# Altium PCB NBP-28 Pin_Swap_Example.PcbDoc (part 3 of 4)
Units mil, origin at the board's own origin, x right, y up, seen from the top; angles counter-clockwise.
Board outline 2716.54 x 4967.15 mil, 10 copper layers (Top Layer, Mid-Layer 1, VCC1V2, Mid-Layer 2, VCC, GND, MidLayer4, VCCINT, Mid-Layer 3, Bottom Layer), stack 81 mil thick; 254 components, 445 nets, 1667 pads, 770 vias.
Unrouted connection lines stored in the file: 611.
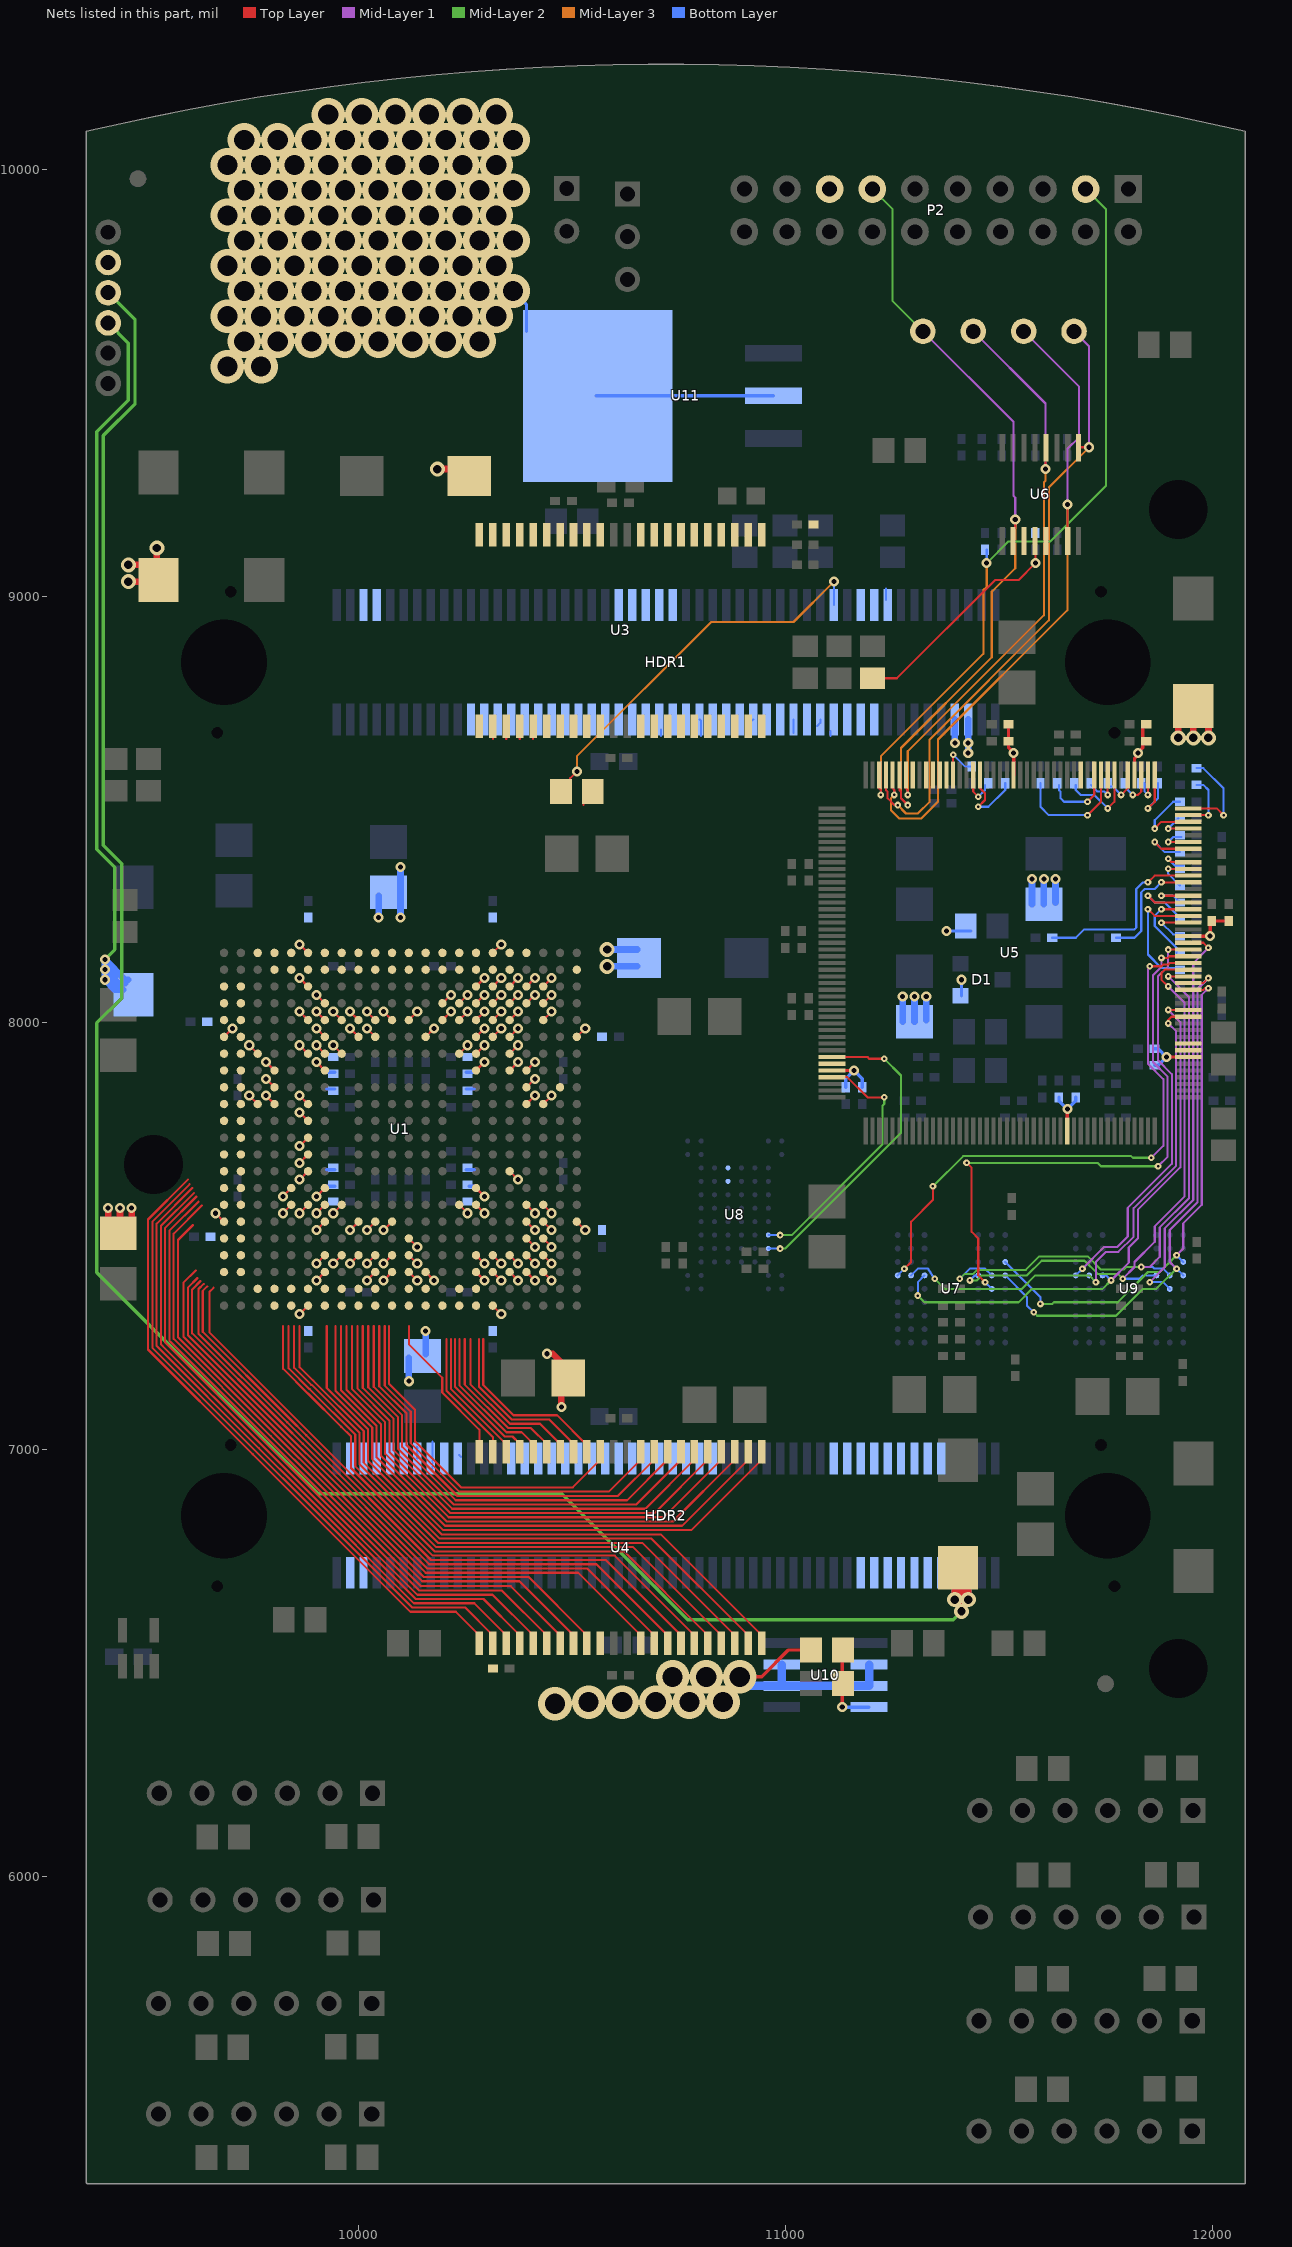
[diagram p10: the nets of this part, all layers, seen from the top]

## Via types
v1: diameter 23.62, hole 11.81, Top Layer to Bottom Layer, 495 vias
v2: diameter 78.74, hole 47.24, Top Layer to Bottom Layer, 101 vias
v3: diameter 15.75, hole 5.91, Top Layer to Bottom Layer, 92 vias
v4: diameter 35.43, hole 19.68, Top Layer to Bottom Layer, 59 vias
v5: diameter 19.68, hole 7.87, Top Layer to Bottom Layer, 23 vias

## Nets (pads, with @x,y where several pads share a name; then routed paths per layer and width w, separated by ;. In a path a pad name is that pad's centre, name@x,y a point inside that pad or via, vN(x,y) a via of type N, cw(c..) or ccw(c..) an arc to the next point about the centre after c; other vN are vias at no path point) (continued)
NetR25_1: R25.1 U5.127 | length 83.6
  Top Layer w5: v3(11897.11,8424.19) U5.127@11944.36,8424.19
  Bottom Layer w5: v3(11897.11,8424.19) 11908.93,8436 R25.1@11928.61,8436
NetR26_1: R26.1 U5.126 | length 154.1
  Top Layer w5: v3(11865.62,8424.19) 11881.37,8408.44 U5.126@11944.36,8408.44
  Bottom Layer w5: v3(11865.62,8424.19) 11889.24,8400.57 R26.1@11924.67,8400.57
NetR27_1: R27.1 U5.124 | length 92.5
  Top Layer w5: v3(11897.11,8384.82) 11904.99,8376.95 U5.124@11944.36,8376.95
  Bottom Layer w5: v3(11897.11,8384.82) 11912.86,8369.07 R27.1@11932.55,8369.07
NetR28_1: R28.1 U5.123 | length 98
  Top Layer w5: v3(11897.11,8361.2) U5.123@11944.36,8361.2
  Bottom Layer w5: v3(11897.11,8361.2) 11897.11,8349.39 R28.1@11924.67,8321.83
NetR29_1: R29.1 U5.122 | length 432.3
  Top Layer w5: v3(11849.87,8329.7) 11865.62,8345.45 U5.122@11944.36,8345.45
  Bottom Layer w5: R29.1@11625.46,8199.78 11680.58,8199.78 11700.26,8219.47 11818.37,8219.47 11822.31,8223.41 11822.31,8313.96 11838.06,8329.7 v3(11849.87,8329.7)
NetR30_1: R30.1 U5.121 | length 276.1
  Top Layer w5: v3(11881.37,8329.7) U5.121@11944.36,8329.7
  Bottom Layer w5: R30.1@11775.07,8199.78 11818.37,8199.78 11834.12,8215.53 11834.12,8306.08 11842,8313.96 11865.62,8313.96 v3(11881.37,8329.7)
NetR31_1: R31.1 U5.119 | length 112.8
  Top Layer w5: v3(11881.37,8298.21) U5.119@11944.36,8298.21
  Bottom Layer w5: v3(11881.37,8298.21) 11908.93,8298.21 R31.1@11924.67,8282.46
NetR32_1: R32.1 U5.118 | length 197.7
  Top Layer w5: v3(11849.87,8298.21) 11865.62,8282.46 U5.118@11944.36,8282.46
  Bottom Layer w5: v3(11849.87,8298.21) 11865.62,8282.46 11889.24,8282.46 11916.8,8254.9 R32.1@11916.8,8243.09
NetR33_1: R33.1 U5.117 | length 193.1
  Top Layer w5: v3(11881.37,8266.71) U5.117@11944.36,8266.71
  Bottom Layer w5: v3(11881.37,8266.71) 11865.62,8250.96 11865.62,8227.34 11916.8,8176.16 R33.1@11916.8,8164.35
NetR34_1: R34.1 U5.116 | length 299.1
  Top Layer w5: v3(11849.87,8266.71) 11865.62,8250.96 U5.116@11944.36,8250.96
  Bottom Layer w5: v3(11849.87,8266.71) 11849.87,8160.41 11881.37,8128.92 R34.1@11928.61,8128.92
NetR35_1: R35.1 U5.115 | length 125.6
  Top Layer w5: v3(11881.37,8235.22) U5.115@11944.36,8235.22
  Bottom Layer w5: v3(11881.37,8235.22) 11908.93,8207.66 R35.1@11932.55,8207.66
NetR39_1: R39.1 U5.129 | length 80.6
  Top Layer w5: v3(11897.11,8455.69) U5.129@11944.36,8455.69
  Bottom Layer w5: v3(11897.11,8455.69) R39.1@11920.74,8479.31
NetR40_1: R40.1 U5.131 | length 138.8
  Top Layer w5: U5.131@11944.36,8487.18 v3(11991.6,8487.18)
  Bottom Layer w5: R40.1@11964.04,8558.05 11979.79,8558.05 11991.6,8546.24 v3(11991.6,8487.18)
NetR41_1: R41.1 U5.133 | length 154.1
  Top Layer w5: v3(11849.87,8502.93) 11865.62,8518.68 U5.133@11865.62,8581.67
  Bottom Layer w5: v3(11849.87,8502.93) 11873.49,8526.56 R41.1@11873.49,8561.99
NetR42_1: R42.1 U5.134 | length 78.1
  Top Layer w5: v3(11849.87,8534.43) U5.134@11849.87,8581.67
  Bottom Layer w5: R42.1@11842,8561.99 11842,8542.3 v3(11849.87,8534.43)
NetR43_1: R43.1 U5.135 | length 98.7
  Top Layer w5: v3(11814.44,8534.43) 11826.25,8534.43 11834.12,8542.3 U5.135@11834.12,8581.67
  Bottom Layer w5: R43.1@11802.63,8565.92 11802.63,8546.24 v3(11814.44,8534.43)
NetR45_1: R45.1 U5.137 | length 93.4
  Top Layer w5: v3(11786.88,8534.43) 11802.63,8550.18 U5.137@11802.63,8581.67
  Bottom Layer w5: R45.1@11755.38,8554.11 11767.19,8554.11 v3(11786.88,8534.43)
NetR48_1: R48.1 U5.130 | length 181.9
  Top Layer w5: v3(11865.62,8455.69) 11881.37,8471.44 U5.130@11944.36,8471.44
  Bottom Layer w5: v3(11865.62,8455.69) 11865.62,8475.37 11908.93,8518.68 R48.1@11924.67,8518.68
NetR49_1: R49.1 U5.132 | length 234.8
  Top Layer w5: U5.132@11944.36,8502.93 12011.29,8502.93 v3(12027.04,8487.18)
  Bottom Layer w5: R49.1@11964.04,8597.42 11979.79,8597.42 12027.04,8550.18 v3(12027.04,8487.18)
NetR50_1: R50.1 U5.139 | length 189.8
  Top Layer w5: v3(11755.38,8502.93) 11771.13,8518.68 U5.139@11771.13,8581.67
  Bottom Layer w5: R50.1@11680.58,8558.05 11680.58,8546.24 11692.39,8534.43 11723.89,8534.43 v3(11755.38,8502.93)
NetR51_1: R51.1 U5.140 | length 96.4
  Top Layer w5: v3(11755.38,8534.43) U5.140@11755.38,8581.67
  Bottom Layer w5: R51.1@11716.01,8558.05 11731.39,8542.68 11747.13,8542.68 v3(11755.38,8534.43)
NetR52_1: R52.1 U5.141 | length 281
  Top Layer w5: v3(11708.14,8487.18) 11739.63,8518.68 U5.141@11739.63,8581.67
  Bottom Layer w5: R52.1@11597.9,8561.99 11597.9,8506.87 11617.59,8487.18 v3(11708.14,8487.18)
NetR53_1: R53.1 U5.142 | length 168.9
  Top Layer w5: v3(11708.14,8518.68) 11723.89,8534.43 U5.142@11723.89,8581.67
  Bottom Layer w5: R53.1@11641.21,8558.05 11641.21,8546.24 11645.15,8542.3 11645.15,8526.55 11653.02,8518.68 v3(11708.14,8518.68)
NetR54_1: R54.1 U5.159 | length 181.3
  Top Layer w5: v3(11452.23,8506.87) 11467.98,8522.62 11467.98,8538.37 11456.17,8550.18 U5.159@11456.17,8581.67
  Bottom Layer w5: v3(11452.23,8506.87) 11475.85,8506.87 11515.22,8546.24 R54.1@11515.22,8561.99
NetR55_1: R55.1 U5.160 | length 90.2
  Top Layer w5: U5.160@11440.42,8581.67 11440.42,8542.3 v3(11452.23,8530.49)
  Bottom Layer w5: v3(11452.23,8530.49) 11467.98,8546.24 R55.1@11467.98,8558.05
NetR56_1: R56.1 U5.163 | length 102
  Top Layer w5: U5.163@11393.18,8581.67 v3(11393.18,8628.92)
  Bottom Layer w5: v3(11393.18,8628.92) 11420.74,8601.36 R56.1@11436.48,8601.36
NetR64_2: R64.2 R65.1 U10.4 | length 197.5
  Top Layer w7.87: v1(11133.33,6396.63) 11133.33,6528.52 R64.2@11135.3,6530.49
  Bottom Layer w7.87: v1(11133.33,6396.63) U10.4@11196.13,6396.63
NEXUS_TCK: HDR1.82 U1.F9 | length 27.8
  Top Layer w5: v1(9979.79,7987.19) U1.F9@9999.48,7967.5
NEXUS_TDI: HDR1.84 U1.G6 | length 55.4
  Top Layer w5: v1(9861.68,7947.82) U1.G6@9881.37,7928.13
  Bottom Layer w5: HDR1.84@11235.7,8991.12 11235.7,9018.68
NEXUS_TDO: HDR1.76 R2.1 | length 896.6
  Top Layer w5: R2.1@10495.54,8561.99 10495.54,8573.8 v1(10511.29,8589.55)
  Mid-Layer 3 w5: v1(10511.29,8589.55) 10511.29,8624.98 10826.25,8939.94 11019.16,8939.94 v1(11113.65,9034.43)
  Bottom Layer w5: HDR1.76@11113.65,8979.31 v1(11113.65,9034.43)
NEXUS_TDO_R: R2.2 U1.E18 | length 43.6
  Top Layer w5: U1.E18@10353.81,8006.87 v1(10373.49,8026.56) ; 10527.04,8510.81 R2.2@10527.04,8526.55
NEXUS_TMS: HDR1.80 U1.F10 | length 27.8
  Top Layer w5: v1(10019.16,7987.19) U1.F10@10038.85,7967.5
NFLASH_CS: U5.41 U8.H2 | length 609.3
  Top Layer w5: U5.41@11109.71,7873.01 11145.15,7873.01 11192.39,7825.77 v3(11231.76,7825.77)
  Mid-Layer 2 w5: v3(10987.67,7502.93) 11015.22,7502.93 11227.82,7715.53 11227.82,7806.08 11231.76,7810.02 v3(11231.76,7825.77)
  Bottom Layer w5: U8.H2@10960.11,7502.93 v3(10987.67,7502.93)
NOE: U1.J21 U5.38 U8.J2 | length 736.8
  Top Layer w5: U5.38@11109.71,7920.26 11192.39,7920.26 11196.33,7916.32 v3(11231.76,7916.32)
  Mid-Layer 2 w5: v3(10987.67,7471.44) 10999.48,7471.44 11271.13,7743.09 11271.13,7876.95 v3(11231.76,7916.32)
  Bottom Layer w5: U8.J2@10960.11,7471.44 v3(10987.67,7471.44)
NRESETOUT: U1.F17 U5.97 U8.D5 | length 27.8
  Top Layer w5: U1.F17@10314.44,7967.5 v1(10334.12,7987.19)
NSDRAM_CAS: U5.108 U7.F7 U9.F7 | length 1367
  Top Layer w5: v3(11897.11,8085.61) 11881.37,8101.36 11881.37,8117.11 11889.24,8124.98 U5.108@11944.36,8124.98
  Mid-Layer 1 w5: v3(11790.82,7400.57) 11818.37,7428.13 11818.37,7439.94 11865.62,7487.18 11865.62,7523.34 11935.85,7593.58 11935.85,8046.87 v3(11897.11,8085.61)
  Mid-Layer 2 w5: v3(11432.55,7396.63) 11448.3,7396.63 11460.11,7408.44 11566.41,7408.44 11600.89,7442.93 11701.21,7442.93 11732.08,7412.07 11779.32,7412.07 v3(11790.82,7400.57)
  Bottom Layer w5: v3(11432.55,7396.63) 11444.36,7408.44 U7.F7@11452.23,7408.44 ; v3(11790.82,7400.57) 11830.19,7400.57 11838.06,7408.44 U9.F7@11869.56,7408.44
NSDRAM_CS: U5.105 U7.G9 U9.G9 | length 1227
  Top Layer w5: U5.105@11944.36,8077.74 11979.79,8077.74 11983.73,8081.67 v3(11991.6,8081.67)
  Mid-Layer 1 w5: v3(11916.8,7455.69) 11932.55,7471.44 11932.55,7530.49 11975.85,7573.8 11975.85,8065.93 v3(11991.6,8081.67)
  Mid-Layer 2 w5: v3(11597.9,7341.52) 11625.46,7341.52 11629.4,7345.45 11779,7345.45 11849.87,7416.32 11877.43,7416.32 v3(11916.8,7455.69)
  Bottom Layer w5: U7.G9@11515.22,7439.94 11597.9,7357.26 v3(11597.9,7341.52) ; v3(11916.8,7455.69) U9.G9@11932.55,7439.94
NSDRAM_RAS: U5.107 U7.F8 U9.F8 | length 1434.7
  Top Layer w5: v3(11897.11,8109.23) U5.107@11944.36,8109.23
  Mid-Layer 1 w5: v3(11834.12,7428.13) 11853.81,7428.13 11877.43,7451.75 11877.43,7521.01 11945.85,7589.44 11945.85,8060.49 v3(11897.11,8109.23)
  Mid-Layer 2 w5: v3(11408.93,7400.57) 11420.42,7412.07 11440.11,7412.07 11449.48,7421.44 11563.65,7421.44 11595.15,7452.93 11708.87,7452.93 11739.74,7422.07 11792.63,7422.07 11798.69,7428.13 v3(11834.12,7428.13)
  Bottom Layer w5: v3(11408.93,7400.57) 11432.55,7424.19 11467.98,7424.19 U7.F8@11483.73,7408.44 ; v3(11834.12,7428.13) 11861.34,7428.13 11865.27,7424.19 11885.3,7424.19 U9.F8@11901.05,7408.44
NSDRAM_WE: U5.106 U7.F9 U9.F9 | length 1297.4
  Top Layer w5: U5.106@11944.36,8093.48 11979.79,8093.48 v3(11991.6,8105.3)
  Mid-Layer 1 w5: v3(11916.8,7424.19) 11901.05,7439.94 11901.05,7514.74 11965.85,7579.55 11965.85,8079.55 v3(11991.6,8105.3)
  Mid-Layer 2 w5: v3(11582.15,7321.83) 11590.03,7313.96 11775.07,7313.96 11838.06,7376.95 11869.56,7376.95 v3(11916.8,7424.19)
  Bottom Layer w5: U7.F9@11515.22,7408.44 11566.41,7357.26 11566.41,7337.58 v3(11582.15,7321.83) ; v3(11916.8,7424.19) U9.F9@11932.55,7408.44
NTRST: P2.3 R57.1 U5.174 | length 1796.4
  Top Layer w5: U5.174@11219.95,8581.67 11219.95,8550.18 11223.89,8546.24 v3(11223.89,8534.43)
  Mid-Layer 2 w5: v1(11471.92,9077.74) 11523.1,9128.92 11621.52,9128.92 11751.45,9258.84 11751.45,9906.87 P2.3@11703.81,9954.51
  Mid-Layer 3 w5: v3(11223.89,8534.43) 11223.89,8624.98 11464.04,8865.14 11464.04,9014.74 11471.92,9022.62 v1(11471.92,9077.74)
  Bottom Layer w5: v1(11471.92,9077.74) R57.1@11471.92,9109.23
NWAIT: U1.P18 U5.144 | length 27.8
  Top Layer w5: U1.P18@10353.81,7652.54 v1(10373.49,7632.85)
NWE: U1.F16 U5.39 U8.C5 | length 27.8
  Top Layer w5: U1.F16@10275.07,7967.5 v1(10294.75,7987.19)
PP_CTRL.NRESETIN: P2.15 R24.1 U1.H19 U5.96 | length 27.8
  Top Layer w5: U1.H19@10393.18,7888.76 v1(10412.86,7908.45)
PRO_P.SSPCLK: U1.B17 U5.165
PRO_P.SSPEN: U1.A18 U5.166
PRO_P.SSPFRM: U1.B16 U5.164
PRO_P.SSPRX_UART2RX: U1.A19 U5.169
PRO_P.SSPTX_UART2TX: U1.B18 U5.167
PROCESSOR_TDI: R1.2 U1.B22 U6.3 U6.5
PROCESSOR_TDO: R6.1 U6.4 | length 544.8
  Top Layer w5: R6.1@11204.2,8808.05 11261.29,8808.05 11491.6,9038.37 11546.72,9038.37 v1(11586.09,9077.74) U6.4@11586.09,9128.92
RAM0_DATA0: HDR2.42 U1.V19 | length 27.8
  Top Layer w5: U1.V19@10393.18,7495.06 v1(10412.86,7475.37)
RAM0_DATA1: HDR2.40 U1.Y19 | length 27.8
  Top Layer w5: U1.Y19@10393.18,7416.32 v1(10412.86,7396.63)
RAM0_DATA2: HDR2.38 U1.W18 | length 27.8
  Top Layer w5: U1.W18@10353.81,7455.69 v1(10373.49,7436)
RAM0_DATA3: HDR2.36 U1.Y18 | length 27.8
  Top Layer w5: U1.Y18@10353.81,7416.32 v1(10373.49,7396.63)
RAM0_DATA4: HDR2.34 U1.W17 | length 27.8
  Top Layer w5: U1.W17@10314.44,7455.69 v1(10334.12,7436)
RAM0_DATA5: HDR2.32 U1.Y17 | length 27.8
  Top Layer w5: U1.Y17@10314.44,7416.32 v1(10334.12,7396.63)
RAM0_DATA6: HDR2.30 U1.W16 | length 27.8
  Top Layer w5: U1.W16@10275.07,7455.69 v1(10294.75,7436)
RAM0_DATA7: HDR2.28 U1.Y16 | length 27.8
  Top Layer w5: U1.Y16@10275.07,7416.32 v1(10294.75,7396.63)
RAM0_OE: HDR1.41 U1.C20 | length 27.8
  Top Layer w5: U1.C20@10432.55,8085.61 v1(10452.23,8105.3)
RAM0_WE: HDR1.79 U1.E20 | length 27.8
  Top Layer w5: U1.E20@10432.55,8006.87 v1(10452.23,8026.56)
RAM1_DATA0: HDR1.45 U1.E8 | length 27.8
  Top Layer w5: v1(9940.42,8026.56) U1.E8@9960.11,8006.87
RAM1_DATA1: HDR1.49 U1.E6 | length 43.6
  Top Layer w5: v1(9861.68,8026.56) U1.E6@9881.37,8006.87
  Bottom Layer w5: 10708.14,8672.22 HDR1.49@10708.14,8687.97
RAM1_DATA2: HDR1.53 U1.E10 | length 27.8
  Top Layer w5: v1(10019.16,8026.56) U1.E10@10038.85,8006.87
RAM1_DATA3: HDR1.57 U1.E12 | length 27.8
  Top Layer w5: U1.E12@10117.59,8006.87 v1(10137.27,8026.56)
RAM1_DATA4: HDR1.55 U1.E11 | length 68.8
  Top Layer w5: v1(10058.53,8026.56) U1.E11@10078.22,8006.87
  Bottom Layer w5: HDR1.55@10798.69,8711.59 10802.63,8707.66 10802.63,8672.22
RAM1_DATA5: HDR1.51 U1.E7 | length 27.8
  Top Layer w5: v1(9901.05,8026.56) U1.E7@9920.74,8006.87
RAM1_DATA6: HDR1.47 U1.E9 | length 27.8
  Top Layer w5: v1(9979.79,8026.56) U1.E9@9999.48,8006.87
RAM1_DATA7: HDR1.43 U1.F7 | length 27.8
  Top Layer w5: v1(9901.05,7987.19) U1.F7@9920.74,7967.5
RAM1_OE: HDR1.39 U1.D19 | length 27.8
  Top Layer w5: U1.D19@10393.18,8046.24 v1(10412.86,8065.93)
RAM1_WE: HDR1.61 U1.E14 | length 27.8
  Top Layer w5: U1.E14@10196.33,8006.87 v1(10216.01,8026.56)
RAM_ADDR0: HDR1.21 U1.D14 | length 27.8
  Top Layer w5: U1.D14@10196.33,8046.24 v1(10216.01,8065.93)
RAM_ADDR1: HDR1.25 U1.C16 | length 27.8
  Top Layer w5: U1.C16@10275.07,8085.61 v1(10294.75,8105.3)
RAM_ADDR2: HDR1.29 U1.C17 | length 27.8
  Top Layer w5: U1.C17@10314.44,8085.61 v1(10334.12,8105.3)
RAM_ADDR3: HDR1.33 U1.C18 | length 27.8
  Top Layer w5: U1.C18@10353.81,8085.61 v1(10373.49,8105.3)
RAM_ADDR4: HDR1.65 U1.E17 | length 27.8
  Top Layer w5: U1.E17@10314.44,8006.87 v1(10334.12,8026.56)
RAM_ADDR5: HDR1.69 U1.A16 | length 31.5
  Bottom Layer w5: HDR1.69@11019.16,8680.1 HDR1.69@11019.16,8711.59
RAM_ADDR6: HDR1.73 U1.F18 | length 46.8
  Top Layer w5: U1.F18@10353.81,7967.5 v1(10373.49,7987.19)
  Bottom Layer w5: HDR1.73@11074.28,8695.85 11082.15,8703.72 HDR1.73@11082.15,8711.59
RAM_ADDR7: HDR1.77 U1.D20 | length 27.8
  Top Layer w5: U1.D20@10432.55,8046.24 v1(10452.23,8065.93)
RAM_ADDR8: HDR1.75 U1.G18 | length 39.7
  Top Layer w5: U1.G18@10353.81,7928.13 v1(10373.49,7947.82)
  Bottom Layer w5: 11105.78,8672.22 HDR1.75@11105.78,8684.04
RAM_ADDR9: HDR1.71 U1.B15
RAM_ADDR10: HDR1.67 U1.E16 | length 27.8
  Top Layer w5: U1.E16@10275.07,8006.87 v1(10294.75,8026.56)
RAM_ADDR11: HDR1.63 U1.E15 | length 70.5
  Top Layer w5: U1.E15@10235.7,8006.87 v1(10255.38,8026.56)
  Bottom Layer w5: 10916.8,8672.22 10916.8,8703.72 HDR1.63@10924.67,8711.59
RAM_ADDR12: HDR1.59 U1.F13 | length 27.8
  Top Layer w5: U1.F13@10156.96,7967.5 v1(10176.64,7987.19)
RAM_ADDR13: HDR1.35 U1.D18 | length 27.8
  Top Layer w5: U1.D18@10353.81,8046.24 v1(10373.49,8065.93)
RAM_ADDR14: HDR1.31 U1.D17 | length 27.8
  Top Layer w5: U1.D17@10314.44,8046.24 v1(10334.12,8065.93)
RAM_ADDR15: HDR1.27 U1.D16 | length 27.8
  Top Layer w5: U1.D16@10275.07,8046.24 v1(10294.75,8065.93)
RAM_ADDR16: HDR1.23 U1.D15 | length 27.8
  Top Layer w5: U1.D15@10235.7,8046.24 v1(10255.38,8065.93)
RAM_CS: HDR1.37 U1.C19 | length 27.8
  Top Layer w5: U1.C19@10393.18,8085.61 v1(10412.86,8105.3)
RED0: HDR1.6 U1.D7 | length 27.8
  Top Layer w5: v1(9901.05,8065.93) U1.D7@9920.74,8046.24
RED1: HDR1.8 U1.C6 | length 27.8
  Top Layer w5: v1(9861.68,8105.3) U1.C6@9881.37,8085.61
REF_CLK: HDR2.4 U1.AB12
SCL: HDR2.5 U1.Y7 | length 27.8
  Top Layer w5: v1(9901.05,7396.63) U1.Y7@9920.74,7416.32
SDA: HDR2.3 U1.W7 | length 27.8
  Top Layer w5: v1(9901.05,7436) U1.W7@9920.74,7455.69
SDRAM_CKE: U5.102 U7.F3 U9.F3 | length 1319.2
  Top Layer w5: v3(11897.11,8030.49) U5.102@11944.36,8030.49
  Mid-Layer 1 w5: v3(11763.26,7396.63) 11804.94,7438.32 11804.94,7473.75 11826.25,7495.06 11826.25,7561.99 11925.85,7661.59 11925.85,8001.75 v3(11897.11,8030.49)
  Mid-Layer 2 w5: v3(11310.5,7361.2) 11326.25,7345.45 11546.72,7345.45 11578.22,7376.95 11743.57,7376.95 v3(11763.26,7396.63)
  Bottom Layer w5: v3(11310.5,7361.2) 11310.5,7392.7 U7.F3@11326.25,7408.44 ; U9.F3@11743.57,7408.44 11751.45,7408.44 v3(11763.26,7396.63)
SDRAM_CLK: U5.101 U7.F2 U9.F2 | length 1271.3
  Top Layer w5: v3(11897.11,7999) 11897.11,8006.87 11904.99,8014.74 U5.101@11944.36,8014.74
  Mid-Layer 1 w5: v3(11727.82,7392.7) 11727.82,7439.94 11751.45,7463.56 11780.61,7463.56 11816.25,7499.2 11816.25,7566.13 11915.85,7665.74 11915.85,7980.26 v3(11897.11,7999)
  Mid-Layer 2 w5: v3(11349.87,7400.57) 11373.49,7376.95 11554.59,7376.95 11586.09,7408.44 11712.08,7408.44 v3(11727.82,7392.7)
  Bottom Layer w5: U7.F2@11294.75,7408.44 11310.5,7424.19 11334.12,7424.19 v3(11349.87,7400.57) ; U9.F2@11712.08,7408.44 v3(11727.82,7392.7)
SDRAM_DQM0: U5.112 U9.E8 | length 946.4
  Top Layer w5: U5.112@11944.36,8187.97 11979.79,8187.97 v3(11991.6,8176.16)
  Mid-Layer 1 w5: v3(11853.81,7392.7) 11889.24,7428.13 11889.24,7518.68 11955.85,7585.3 11955.85,8140.41 v3(11991.6,8176.16)
  Bottom Layer w5: v3(11853.81,7392.7) 11885.3,7392.7 U9.E8@11901.05,7376.95
SDRAM_DQM1: U5.111 U9.F1 | length 945.5
  Top Layer w5: v3(11897.11,8172.22) U5.111@11944.36,8172.22
  Mid-Layer 1 w5: v3(11696.33,7424.19) 11747.51,7475.37 11778.28,7475.37 11802.63,7499.72 11802.63,7566.65 11905.85,7669.88 11905.85,7880.02 11873.49,7912.38 11873.49,8109.23 11897.11,8132.85 v3(11897.11,8172.22)
  Bottom Layer w5: U9.F1@11680.58,7408.44 v3(11696.33,7424.19)
SDRAM_DQM2: U5.110 U7.E8 | length 1356.2
  Top Layer w5: v3(11424.67,7672.22) 11436.48,7660.41 11436.48,7510.81 11452.23,7495.06 11452.23,7408.44 v3(11467.98,7392.7) ; v3(11881.37,8152.54) 11897.11,8152.54 11901.05,8156.48 U5.110@11944.36,8156.48
  Mid-Layer 1 w5: v3(11873.49,7664.35) 11895.85,7686.71 11895.85,7874.27 11861.68,7908.44 11861.68,8111.56 11881.37,8131.25 v3(11881.37,8152.54)
  Mid-Layer 2 w5: v3(11424.67,7672.22) 11731.76,7672.22 11739.63,7664.35 v3(11873.49,7664.35)
  Bottom Layer w5: v3(11467.98,7392.7) U7.E8@11483.73,7376.95
SDRAM_DQM3: U5.109 U7.F1 | length 1355.8
  Top Layer w5: v3(11279,7424.19) 11294.75,7439.94 11294.75,7534.43 11345.93,7585.61 v3(11345.93,7617.11) ; v3(11853.81,8132.85) 11881.37,8132.85 11885.3,8136.79 11897.11,8136.79 11901.05,8140.73 U5.109@11944.36,8140.73
  Mid-Layer 1 w5: v3(11853.81,8132.85) 11849.87,8124.98 11849.87,7904.51 11885.85,7868.52 11885.85,7712.15 v3(11857.74,7684.04)
  Mid-Layer 2 w5: v3(11345.93,7617.11) 11416.8,7687.97 11810.5,7687.97 11814.44,7684.04 v3(11857.74,7684.04)
  Bottom Layer w5: U7.F1@11263.26,7408.44 v3(11279,7424.19)
SP0: HDR2.79 U1.K6 | length 27.8
  Top Layer w5: v1(9861.68,7829.71) U1.K6@9881.37,7810.02
SP1: HDR2.81 U1.T5 | length 27.8
  Top Layer w5: v1(9822.31,7554.11) U1.T5@9842,7573.8
SP2: HDR2.83 U1.M2
SP3: HDR2.85 U1.T6 | length 27.8
  Top Layer w5: v1(9861.68,7554.11) U1.T6@9881.37,7573.8
SP4: HDR2.87 U1.R5 | length 27.8
  Top Layer w5: v1(9822.31,7593.48) U1.R5@9842,7613.17
SP5: HDR2.89 U1.U7 | length 27.8
  Top Layer w5: v1(9901.05,7514.74) U1.U7@9920.74,7534.43
SP6: HDR2.91 U1.P6 | length 27.8
  Top Layer w5: v1(9861.68,7632.85) U1.P6@9881.37,7652.54
SP7: HDR2.90 U1.L6 | length 27.8
  Top Layer w5: v1(9861.68,7790.34) U1.L6@9881.37,7770.65
SP8: HDR2.92 U1.U11 | length 27.8
  Top Layer w5: v1(10058.53,7514.74) U1.U11@10078.22,7534.43
SP9: HDR2.88 U1.M6 | length 27.8
  Top Layer w5: v1(9861.68,7711.59) U1.M6@9881.37,7731.28
SP10: HDR2.86 U1.U10 | length 27.8
  Top Layer w5: v1(10019.16,7514.74) U1.U10@10038.85,7534.43
SP11: HDR2.84 U1.U9 | length 27.8
  Top Layer w5: v1(9979.79,7514.74) U1.U9@9999.48,7534.43
SP12: HDR2.82 U1.N6 | length 27.8
  Top Layer w5: v1(9861.68,7672.22) U1.N6@9881.37,7691.91
SP13: HDR2.80 U1.J19 | length 27.8
  Top Layer w5: U1.J19@10393.18,7849.39 v1(10412.86,7869.08)
SP14: HDR2.78 U1.K20 | length 27.8
  Top Layer w5: U1.K20@10432.55,7810.02 v1(10452.23,7829.71)
SP15: HDR2.76 U1.K19 | length 27.8
  Top Layer w5: U1.K19@10393.18,7810.02 v1(10412.86,7829.71)
SPI_CLK: HDR1.46 U1.H4 | length 27.8
  Top Layer w5: v1(9782.94,7908.45) U1.H4@9802.63,7888.76
SPI_DIN: HDR1.44 U1.G3 | length 27.8
  Top Layer w5: v1(9743.57,7947.82) U1.G3@9763.26,7928.13
SPI_DOUT: HDR1.50 U1.K4 | length 27.8
  Top Layer w5: v1(9782.94,7829.71) U1.K4@9802.63,7810.02
SPI_MODE: HDR1.52 U1.K3 | length 27.8
  Top Layer w5: v1(9743.57,7829.71) U1.K3@9763.26,7810.02
SPI_SEL: HDR1.48 U1.J4 | length 27.8
  Top Layer w5: v1(9782.94,7869.08) U1.J4@9802.63,7849.39
SRAM0_A0: U1.A13 U3.1 | length 4.9
  Top Layer w5: U3.1@10282.94,8695.85 U3.1@10282.94,8700.77
SRAM0_A1: U1.B13 U3.2 | length 34.4
  Top Layer w5: 10314.44,8666.32 U3.2@10314.44,8700.77
SRAM0_A2: U1.A14 U3.3 | length 34.4
  Top Layer w5: 10345.93,8666.32 U3.3@10345.93,8700.77
SRAM0_A3: U1.B14 U3.4 | length 34.4
  Top Layer w5: 10377.43,8666.32 U3.4@10377.43,8700.77
SRAM0_A4: U1.A15 U3.5 | length 34.4
  Top Layer w5: 10408.93,8666.32 U3.5@10408.93,8700.77
SRAM0_A5: U1.B7 U3.18
SRAM0_A6: U1.A7 U3.19
SRAM0_A7: U1.B6 U3.20
SRAM0_A8: U1.B5 U3.21
SRAM0_A9: U1.A5 U3.22
SRAM0_A10: U1.B4 U3.23
SRAM0_A11: U1.A4 U3.24
SRAM0_A12: U1.A3 U3.25
SRAM0_A13: U1.C2 U3.26
SRAM0_A14: U1.C1 U3.27
SRAM0_A15: U1.K1 U3.42
SRAM0_A16: U1.L2 U3.43 | length 18.7
  Top Layer w5: U3.43@10314.44,9121.04 U3.43@10314.44,9139.74
SRAM0_A17: U1.L1 U3.44
SRAM0_A18: U1.D2 U3.28
SRAM0_D0: U1.A12 U3.7
SRAM0_D1: U1.B11 U3.8
SRAM0_D2: U1.A11 U3.9
SRAM0_D3: U1.B10 U3.10
SRAM0_D4: U1.A10 U3.13
SRAM0_D5: U1.B9 U3.14
SRAM0_D6: U1.A9 U3.15
SRAM0_D7: U1.B8 U3.16
SRAM0_D8: U1.D1 U3.29
SRAM0_D9: U1.E2 U3.30
SRAM0_D10: U1.E1 U3.31
SRAM0_D11: U1.F2 U3.32
SRAM0_D12: U1.G2 U3.35
SRAM0_D13: U1.G1 U3.36
SRAM0_D14: U1.H2 U3.37
SRAM0_D15: U1.H1 U3.38
SRAM0_E: U1.B12 U3.6
SRAM0_LB: U1.J2 U3.39
SRAM0_OE: U1.K2 U3.41
SRAM0_UB: U1.J1 U3.40
SRAM0_W: U1.A8 U3.17
SRAM1_A0: U1.Y12 U4.1 | length 1537.3
  Top Layer w5: 9599.71,7632.85 9506.41,7539.55 9506.41,7234.76 9751.85,6989.32 9840.01,6901.15 10121.16,6620 10227.88,6620 10282.94,6564.94 U4.1@10282.94,6546.24 ; U1.Y12@10117.59,7416.32 v1(10137.27,7396.63)
SRAM1_A1: R19.2 U1.W12 U4.2 | length 1543.1
  Top Layer w5: 9603.88,7622.06 9516.41,7534.58 9516.41,7238.9 10125.31,6630 10249.38,6630 10314.44,6564.94 U4.2@10314.44,6546.24 ; U1.W12@10117.59,7455.69 v1(10137.27,7436)
SRAM1_A2: U1.N1 U4.3 | length 1523.9
  Top Layer w5: 9610,7613.17 9526.41,7529.57 9526.41,7243.04 9765.99,7003.46 9860.01,6909.44 10129.45,6640 10270.87,6640 10345.93,6564.94 U4.3@10345.93,6546.24
SRAM1_A3: U1.N2 U4.4 | length 1528.5
  Top Layer w5: 9613.65,7601.36 9536.41,7524.11 9536.41,7247.18 9539.45,7244.14 9540,7243.59 9775.99,7007.6 10133.59,6650 10292.37,6650 10377.43,6564.94 U4.4@10377.43,6546.24
SRAM1_A4: U1.P1 U4.5 | length 1538.2
  Top Layer w5: 9620,7593.48 9546.41,7519.89 9546.41,7251.33 9549.45,7248.28 9550,7247.73 9780.13,7017.6 9880.01,6917.72 10137.63,6660.1 10313.77,6660.1 10408.93,6564.94 U4.5@10408.93,6546.24
SRAM1_A5: U1.Y1 U4.18 | length 1416.6
  Top Layer w5: 9823.06,7290 9823.06,7189.42 9880.71,7131.77 9881.23,7131.77 9959.25,7053.75 9959.44,7053.75 9981.93,7031.27 9981.93,6957.22 10177.61,6761.54 10621.77,6761.54 10818.37,6564.94 U4.18@10818.37,6546.24
SRAM1_A6: U1.Y2 U4.19 | length 1434.5
  Top Layer w5: 9835.93,7290 9835.93,7190.69 9884.85,7141.77 9885.57,7141.77 9991.93,7035.41 9991.93,6961.37 10181.75,6771.54 10643.27,6771.54 10849.87,6564.94 U4.19@10849.87,6546.24
SRAM1_A7: U1.AA3 U4.20 | length 1452.4
  Top Layer w5: 9848.81,7290 9848.81,7191.96 9889,7151.77 9889.71,7151.77 10001.93,7039.55 10001.93,6965.51 10185.89,6781.54 10664.76,6781.54 10881.37,6564.94 U4.20@10881.37,6546.24
SRAM1_A8: U1.AB4 U4.21 | length 1470.3
  Top Layer w5: 9861.68,7290 9861.68,7193.23 9893.14,7161.77 9893.85,7161.77 10011.93,7043.69 10011.93,6969.65 10190.04,6791.54 10686.26,6791.54 10912.86,6564.94 U4.21@10912.86,6546.24
SRAM1_A9: U1.AA4 U4.22 | length 1466.7
  Top Layer w5: 9925.31,7290 9925.31,7144.46 10021.93,7047.83 10021.93,6973.79 10194.18,6801.54 10707.75,6801.54 10944.36,6564.94 U4.22@10944.36,6546.24
SRAM1_A10: U1.AB5 U4.23 | length 1416.3
  Top Layer w5: 9945.33,7290 9945.33,7138.58 10031.93,7051.98 10031.93,6977.93 10198.32,6811.54 10779.54,6811.54 10944.36,6976.36 U4.23@10944.36,6995.06
SRAM1_A11: U1.AA5 U4.24 | length 1362.9
  Top Layer w5: 9958.2,7290 9958.2,7139.85 10041.93,7056.12 10041.93,6982.08 10202.46,6821.54 10758.05,6821.54 10912.86,6976.36 U4.24@10912.86,6995.06
SRAM1_A12: U1.AA6 U4.25 | length 1309.5
  Top Layer w5: 9971.08,7290 9971.08,7141.11 10051.93,7060.26 10051.93,6986.22 10206.6,6831.54 10736.55,6831.54 10881.37,6976.36 U4.25@10881.37,6995.06
SRAM1_A13: U1.AB7 U4.26 | length 1256.1
  Top Layer w5: 9983.95,7290 9983.95,7142.38 10061.93,7064.4 10061.93,6990.36 10210.75,6841.54 10715.06,6841.54 10849.87,6976.36 U4.26@10849.87,6995.06
SRAM1_A14: U1.AA7 U4.27 | length 1202.7
  Top Layer w5: 9996.82,7290 9996.82,7143.65 10071.93,7068.54 10071.93,6994.5 10214.89,6851.54 10693.56,6851.54 10818.37,6976.36 U4.27@10818.37,6995.06
SRAM1_A15: U1.AA12 U4.42 | length 317.6
  Top Layer w5: 10215.95,7258.84 10215.95,7142.8 10345.93,7012.82 U4.42@10345.93,6995.06
SRAM1_A16: U1.AB11 U4.43 | length 308.7
  Top Layer w5: 10205.95,7258.84 10205.95,7138.1 10314.44,7029.62 U4.43@10314.44,6995.06
SRAM1_A17: U1.AA10 U4.44 | length 363.4
  Top Layer w5: 10117.59,7290 10117.59,7246.78 10195.95,7168.41 10195.95,7133.96 10282.94,7046.97 U4.44@10282.94,6995.06
SRAM1_A18: U1.AB8 U4.28 | length 1149.3
  Top Layer w5: 10009.7,7290 10009.7,7144.92 10081.93,7072.69 10081.93,6998.65 10219.03,6861.54 10672.06,6861.54 10786.88,6976.36 U4.28@10786.88,6995.06
SRAM1_D0: U1.R1 U4.7 | length 1552
  Top Layer w5: 9632.35,7572.35 9566.41,7506.41 9566.41,7259.61 9794.27,7031.74 9900.01,6926 10145.92,6680.1 10356.76,6680.1 10471.92,6564.94 U4.7@10471.92,6546.24
SRAM1_D1: U1.R2 U4.8 | length 1512.6
  Top Layer w5: 9611.57,7526.63 9576.41,7491.46 9576.41,7263.75 10148.61,6691.54 10376.81,6691.54 10503.41,6564.94 U4.8@10503.41,6546.24
SRAM1_D2: U1.T1 U4.9 | length 1421.3
  Top Layer w5: 9618.21,7420 9589.22,7391.02 9589.22,7265.08 9808.42,7045.88 9920.01,6934.29 10152.76,6701.54 10398.31,6701.54 10534.91,6564.94 U4.9@10534.91,6546.24
SRAM1_D3: U1.T2 U4.10
SRAM1_D4: U1.U2 U4.13 | length 1514.4
  Top Layer w5: 9622.35,7402.35 9599.71,7379.71 9599.71,7268.73 9600,7268.44 10156.9,6711.54 10514.29,6711.54 10660.89,6564.94 U4.13@10660.89,6546.24
SRAM1_D5: U1.V1 U4.14 | length 1525.2
  Top Layer w5: 9629.42,7395.28 9609.71,7375.57 9609.71,7272.87 9822.56,7060.03 9868.83,7013.75 10161.04,6721.54 10535.79,6721.54 10692.39,6564.94 U4.14@10692.39,6546.24
SRAM1_D6: U1.V2 U4.15 | length 1532.6
  Top Layer w5: 9637,7388.71 9624.7,7376.41 9624.7,7272.03 9832.56,7064.17 10165.18,6731.54 10557.28,6731.54 10723.89,6564.94 U4.15@10723.89,6546.24
SRAM1_D7: U1.W1 U4.16 | length 1544.9
  Top Layer w5: 9645.15,7382.73 9634.7,7372.27 9634.7,7276.17 9836.7,7074.17 9877.12,7033.75 10169.32,6741.54 10578.78,6741.54 10755.38,6564.94 U4.16@10755.38,6546.24
SRAM1_D8: U1.AA8 U4.29 | length 1095.9
  Top Layer w5: 10022.57,7290 10022.57,7146.19 10091.93,7076.83 10091.93,7002.79 10223.17,6871.54 10650.57,6871.54 10755.38,6976.36 U4.29@10755.38,6995.06
SRAM1_D9: U1.AB9 U4.30 | length 1042.5
  Top Layer w5: 10035.45,7290 10035.45,7147.45 10101.93,7080.97 10101.93,7006.93 10227.31,6881.54 10629.07,6881.54 10723.89,6976.36 U4.30@10723.89,6995.06
SRAM1_D10: U1.AA9 U4.31 | length 989.1
  Top Layer w5: 10048.32,7290 10048.32,7148.72 10111.93,7085.11 10111.93,7011.07 10231.46,6891.54 10607.58,6891.54 10692.39,6976.36 U4.31@10692.39,6995.06
SRAM1_D11: U1.AB10 U4.32 | length 935.7
  Top Layer w5: 10061.15,7290 10061.15,7150.04 10121.93,7089.26 10121.93,7015.21 10235.6,6901.54 10586.08,6901.54 10660.89,6976.36 U4.32@10660.89,6995.06
SRAM1_D12: U1.AA16 U4.35 | length 820.5
  Top Layer w5: 10071.15,7290 10071.15,7154.18 10131.93,7093.4 10131.93,7019.36 10239.74,6911.54 10501.59,6911.54 10566.41,6976.36 U4.35@10566.41,6995.06
SRAM1_D13: U1.AB16 U4.36 | length 424.4
  Top Layer w5: 10291.88,7258.84 10291.88,7151.72 10362.91,7080.69 10465.24,7080.69 10534.91,7011.02 U4.36@10534.91,6995.06
SRAM1_D14: U1.AA15 U4.37 | length 406.9
  Top Layer w5: 10281.88,7258.84 10281.88,7147.58 10358.77,7070.69 10446.48,7070.69 10503.41,7013.76 U4.37@10503.41,6995.06
SRAM1_D15: U1.AB15 U4.38 | length 392
  Top Layer w5: 10261.76,7258.84 10261.76,7153.56 10354.63,7060.69 10424.99,7060.69 10471.92,7013.76 U4.38@10471.92,6995.06
SRAM1_E: U1.P2 U4.6 | length 1543.4
  Top Layer w5: 9625,7581.67 9556.41,7513.08 9556.41,7255.47 9559.45,7252.43 10141.78,6670.1 10335.26,6670.1 10440.42,6564.94 U4.6@10440.42,6546.24
SRAM1_LB: U1.AB14 U4.39 | length 374.2
  Top Layer w5: 10248.7,7258.84 10248.7,7152.47 10350.49,7050.69 10403.49,7050.69 10440.42,7013.76 U4.39@10440.42,6995.06
SRAM1_OE: U1.AB13 U4.41 | length 337.2
  Top Layer w5: 10225.95,7258.84 10225.95,7146.94 10342.2,7030.69 10360.5,7030.69 10377.43,7013.76 U4.41@10377.43,6995.06
SRAM1_UB: U1.AA13 U4.40 | length 356.3
  Top Layer w5: 10235.95,7258.84 10235.95,7151.08 10346.35,7040.69 10382,7040.69 10408.93,7013.76 U4.40@10408.93,6995.06
SRAM1_W: U1.W2 U4.17 | length 1558.5
  Top Layer w5: 9660,7379.71 9650,7369.71 9650,7275.01 10173.47,6751.54 10600.27,6751.54 10786.88,6564.94 U4.17@10786.88,6546.24
SW0: HDR2.44 U1.W19 | length 27.8
  Top Layer w5: U1.W19@10393.18,7455.69 v1(10412.86,7436)
SW1: HDR2.46 U1.Y20 | length 27.8
  Top Layer w5: U1.Y20@10432.55,7416.32 v1(10452.23,7396.63)
SW2: HDR2.48 U1.W20 | length 27.8
  Top Layer w5: U1.W20@10432.55,7455.69 v1(10452.23,7436)
SW3: HDR2.50 U1.V20 | length 27.8
  Top Layer w5: U1.V20@10432.55,7495.06 v1(10452.23,7475.37)
SW4: HDR2.52 U1.U19 | length 27.8
  Top Layer w5: U1.U19@10393.18,7534.43 v1(10412.86,7514.74)
SW5: HDR2.54 U1.U20 | length 27.8
  Top Layer w5: U1.U20@10432.55,7534.43 v1(10452.23,7514.74)
SW6: HDR2.56 U1.T19 | length 27.8
  Top Layer w5: U1.T19@10393.18,7573.8 v1(10412.86,7554.11)
SW7: HDR2.58 U1.T20 | length 27.8
  Top Layer w5: U1.T20@10432.55,7573.8 v1(10452.23,7554.11)
SWC0: HDR2.18 U1.V12 | length 27.8
  Top Layer w5: U1.V12@10117.59,7495.06 v1(10137.27,7475.37)
SWC1: HDR2.16 U1.W11 | length 90.8
  Top Layer w5: v1(10058.53,7436) U1.W11@10078.22,7455.69
  Bottom Layer w5: HDR2.16@10172.7,6955.69 10172.7,7018.68
SWC2: HDR2.14 U1.Y11 | length 55.4
  Top Layer w5: v1(10058.53,7396.63) U1.Y11@10078.22,7416.32
  Bottom Layer w5: HDR2.14@10137.27,6979.31 HDR2.14@10137.27,7006.87
SWC3: HDR2.6 U1.W8 | length 27.8
  Top Layer w5: v1(9940.42,7436) U1.W8@9960.11,7455.69
SWR0: HDR2.20 U1.Y13 | length 33.4
  Top Layer w5: U1.Y13@10156.96,7416.32 v1(10176.64,7396.63)
  Bottom Layer w5: HDR2.20@10235.7,6987.18 HDR2.20@10239.63,6983.25
SWR1: HDR2.12 U1.W10 | length 27.8
  Top Layer w5: v1(10019.16,7436) U1.W10@10038.85,7455.69
SWR2: HDR2.10 U1.Y10 | length 27.8
  Top Layer w5: v1(10019.16,7396.63) U1.Y10@10038.85,7416.32
SWR3: HDR2.8 U1.W9 | length 27.8
  Top Layer w5: v1(9979.79,7436) U1.W9@9999.48,7455.69
TCLK: TP4.1 U5.173 U6.9 | length 1476.8
  Top Layer w5: U5.173@11235.7,8581.67 11235.7,8546.24 11239.63,8542.3 11239.63,8526.55 11255.38,8510.81 v3(11263.26,8510.81) ; U6.9@11688.45,9349.39 v1(11712.08,9349.39)
  Mid-Layer 1 w5: TP4.1@11676.64,9621.04 11712.08,9585.61 v1(11712.08,9349.39)
  Mid-Layer 3 w5: v3(11263.26,8510.81) 11282.94,8491.12 11310.5,8491.12 11338.06,8518.68 11338.06,8664.35 11617.59,8943.88 11617.59,9254.9 v1(11712.08,9349.39)
TDI: TP6.1 U5.172 U6.7 | length 1600.1
  Top Layer w5: U5.172@11251.45,8581.67 11251.45,8550.18 11255.38,8546.24 v3(11255.38,8534.43) ; U6.7@11660.89,9130.89 v1(11660.89,9215.53)
  Mid-Layer 1 w5: TP6.1@11558.53,9621.04 11688.45,9491.12 11688.45,9373.01 11660.89,9345.45 v1(11660.89,9215.53)
  Mid-Layer 3 w5: v3(11255.38,8534.43) 11247.51,8526.55 11247.51,8499 11267.19,8479.31 11318.37,8479.31 11357.74,8518.68 11357.74,8664.35 11660.89,8967.5 v1(11660.89,9215.53)
TDO: P2.13 TP3.1 U5.171 U6.2 | length 1809.7
  Top Layer w5: U5.171@11267.19,8581.67 11267.19,8546.24 11271.13,8542.3 11271.13,8526.56 v3(11286.88,8510.81) ; U6.2@11530.97,9152.54 11538.85,9160.41 v1(11538.85,9180.1)
  Mid-Layer 1 w5: TP3.1@11322.31,9621.04 11534.91,9408.44 11534.91,9235.22 11538.85,9231.28 v1(11538.85,9180.1)
  Mid-Layer 2 w5: P2.13@11203.81,9954.51 11251.45,9906.87 11251.45,9691.91 TP3.1@11322.31,9621.04
  Mid-Layer 3 w5: v3(11286.88,8510.81) 11271.13,8526.56 11271.13,8644.67 11483.73,8857.26 11483.73,9010.81 11538.85,9065.92 v1(11538.85,9180.1)
TEST: HDR1.81 U1.H18 | length 27.8
  Top Layer w5: U1.H18@10353.81,7888.76 v1(10373.49,7908.45)
TMS: TP5.1 U5.170 U6.12 | length 1388.5
  Top Layer w5: U5.170@11282.94,8581.67 11282.94,8550.18 11286.88,8546.24 v3(11286.88,8534.43) ; v1(11609.71,9298.21) U6.12@11609.71,9347.42
  Mid-Layer 1 w5: TP5.1@11440.42,9621.04 11609.71,9451.75 v1(11609.71,9298.21)
  Mid-Layer 3 w5: v3(11286.88,8534.43) 11286.88,8636.79 11605.78,8955.69 11605.78,9266.71 11609.71,9270.65 v1(11609.71,9298.21)
VCC1V2: C16.1 C17.1 C18.1 C19.1 C20.1 C21.1 C22.1 C23.1 C24.1 C25.1 C26.1 C27.1 C28.1 C29.1 C130.1 C131.1 TP9.1 U1.G7 U1.G8 U1.G15 U1.G16 U1.H7 U1.H16 U1.R7 U1.R16 U1.T7 U1.T8 U1.T15 U1.T16 U11.2 U11.4 | length 1550.3
  Top Layer w5: v1(9901.05,7554.11) U1.T7@9920.74,7573.8 ; v1(9901.05,7593.48) U1.R7@9920.74,7613.17 ; v1(9901.05,7908.45) U1.H7@9920.74,7888.76 ; v1(9901.05,7947.82) U1.G7@9920.74,7928.13 ; v1(9940.42,7554.11) U1.T8@9960.11,7573.8 ; v1(9940.42,7947.82) U1.G8@9960.11,7928.13 ; U1.T15@10235.7,7573.8 v1(10255.38,7554.11) ; U1.G15@10235.7,7928.13 v1(10255.38,7947.82) ; U1.T16@10275.07,7573.8 v1(10294.75,7554.11) ; U1.R16@10275.07,7613.17 v1(10294.75,7593.48) ; U1.H16@10275.07,7888.76 v1(10294.75,7908.45) ; U1.G16@10275.07,7928.13 v1(10294.75,7947.82)
  Top Layer w15.75: v4(9460.11,9034.43) C130.1@9534.91,9034.43 ; v4(9460.11,9073.8) C130.1@9523.1,9073.8 ; C130.1@9527.04,9046.24 v4(9527.04,9113.17) ; v4(10184.52,9298.21) C131.1@10243.57,9298.21
  Bottom Layer w7.87: 9924.67,7617.11 C20.1@9944.36,7617.11 ; 9924.67,7656.48 C25.1@9944.36,7656.48 ; 9924.67,7845.45 C23.1@9944.36,7845.45 ; 9924.67,7884.82 C21.1@9944.36,7884.82 ; C27.1@10251.45,7656.48 10271.13,7656.48 ; C29.1@10251.45,7845.45 10271.13,7845.45 ; C19.1@10251.45,7884.82 10271.13,7884.82 ; C18.1@10259.32,7617.11 10271.13,7617.11 ; v2(10361.68,9715.53) 10393.18,9684.04 U11.4@10393.18,9621.04 ; U11.4@10556.17,9469.86 U11.4@10560.5,9469.86 U11.2@10971.92,9469.86
  Bottom Layer w15.75: v1(10046.72,8247.03) C17.1@10046.72,8298.21 ; v1(10097.9,8247.03) v1(10097.9,8365.14) ; v1(10117.59,7160.41) C16.1@10117.59,7215.53 ; C16.1@10156.96,7223.41 v1(10156.96,7278.52)
  other v2: 9692.39,9538.37 9771.13,9538.37 9731.76,9597.42 9810.5,9597.42 9889.24,9597.42 9967.98,9597.42 10046.72,9597.42 10125.46,9597.42 10204.2,9597.42 10282.94,9597.42 9692.39,9656.48 9771.13,9656.48 9849.87,9656.48 9928.61,9656.48 10007.35,9656.48 10086.09,9656.48 10164.83,9656.48 10243.57,9656.48 10322.31,9656.48 9731.76,9715.53 9810.5,9715.53 9889.24,9715.53 9967.98,9715.53 10046.72,9715.53 10125.46,9715.53 10204.2,9715.53 10282.94,9715.53 9692.39,9774.59 9771.13,9774.59 9849.87,9774.59 9928.61,9774.59 10007.35,9774.59 10086.09,9774.59 10164.83,9774.59 10243.57,9774.59 10322.31,9774.59 9731.76,9833.64 9810.5,9833.64 9889.24,9833.64 9967.98,9833.64 10046.72,9833.64 10125.46,9833.64 10204.2,9833.64 10282.94,9833.64 10361.68,9833.64 9692.39,9892.7 9771.13,9892.7 9849.87,9892.7 9928.61,9892.7 10007.35,9892.7 10086.09,9892.7 10164.83,9892.7 10243.57,9892.7 10322.31,9892.7 9731.76,9951.75 9810.5,9951.75 9889.24,9951.75 9967.98,9951.75 10046.72,9951.75 10125.46,9951.75 10204.2,9951.75 10282.94,9951.75 10361.68,9951.75 9692.39,10010.81 9771.13,10010.81 9849.87,10010.81 9928.61,10010.81 10007.35,10010.81 10086.09,10010.81 10164.83,10010.81 10243.57,10010.81 10322.31,10010.81 9731.76,10069.86 9810.5,10069.86 9889.24,10069.86 9967.98,10069.86 10046.72,10069.86 10125.46,10069.86 10204.2,10069.86 10282.94,10069.86 10361.68,10069.86 9928.61,10128.92 10007.35,10128.92 10086.09,10128.92 10164.83,10128.92 10243.57,10128.92 10322.31,10128.92
VCC1V8: C88.1 C89.1 C90.1 C91.1 C92.1 C93.1 C94.1 C95.1 C96.1 C97.1 C98.1 C99.1 C100.1 C101.1 C132.1 C133.1 D1.1 HDR1.93 HDR1.95 HDR2.93 HDR2.95 R59.1 TP2.1 U5.40 U5.75 U5.95 U5.113 U5.136 U5.154 | length 6648
  Top Layer w7.87: U5.40@11109.71,7888.76 v1(11160.89,7888.76) ; C95.1@11523.1,8699.78 C96.1@11523.1,8660.41 11523.1,8644.67 v1(11534.91,8632.85) U5.154@11534.91,8581.67 ; U5.75@11660.89,7747.03 v1(11660.89,7798.21) ; U5.136@11818.37,8581.67 11818.37,8621.04 v1@11826.25,8628.92 ; v1(11826.25,8632.85) 11838.06,8644.67 C94.1@11838.06,8703.72 ; v1(11893.18,7920.26) U5.95@11944.36,7920.26 ; U5.113@11944.36,8203.72 v1(11995.54,8203.72) C101.1@11995.54,8235.22 ; C101.1@11999.48,8239.15 C93.1@12038.85,8239.15
  Top Layer w15.75: v4(11397.11,6648.6) C132.1@11397.11,6707.66 ; v4(11412.86,6621.04) C132.1@11412.86,6723.41 ; v4(11428.61,6648.6) C132.1@11428.61,6719.47 ; v4(11920.74,8668.29) C133.1@11920.74,8731.28 ; v4(11956.17,8668.29) C133.1@11956.17,8727.34 ; v4(11991.6,8668.29) C133.1@11991.6,8743.09
  Mid-Layer 2 w7.87: TP2.1@9412.86,9711.59 9475.85,9648.6 9475.85,9451.75 9401.05,9376.95 9401.05,8416.32 9444.36,8373.01 9444.36,8058.05 9386.36,8000.06 9386.36,7415.26 9904.99,6896.63 10475.85,6896.63 10771.13,6601.36 11393.18,6601.36 v4(11412.86,6621.04)
  Bottom Layer w7.87: C97.1@11141.21,7849.39 11141.21,7869.07 v1(11160.89,7888.76) 11180.58,7869.07 C92.1@11180.58,7849.39 ; 11389.24,8215.53 R59.1@11434.52,8215.53 ; D1.1@11412.86,8063.96 v1(11412.86,8101.36) ; C98.1@11641.21,7825.77 11641.21,7817.89 v1(11660.89,7798.21) 11680.58,7817.89 C91.1@11680.58,7825.77 ; C99.1@11865.62,7900.57 11873.49,7900.57 v1(11893.18,7920.26) 11873.49,7939.94 C90.1@11865.62,7939.94
  Bottom Layer w15.75: C88.1@11275.07,8002.93 v1(11275.07,8061.99) ; C88.1@11302.63,8002.93 v1(11302.63,8061.99) ; C88.1@11330.19,8006.87 v1(11330.19,8061.99) ; v4(11397.11,6648.6) HDR2.93@11397.12,6711.59 ; v1(11397.11,8656.48) HDR1.93@11397.11,8711.59 ; v4(11428.61,6648.6) HDR2.95@11428.61,6711.59 ; v1(11428.61,8632.85) v1(11428.61,8656.48) HDR1.95@11428.61,8711.59 ; C89.1@11578.22,8278.52 v1(11578.22,8337.58) ; C89.1@11605.78,8278.52 v1(11605.78,8337.58) ; C89.1@11633.33,8282.46 v1(11633.33,8337.58)
  other v1: 11377.43,8215.53
VCC2V5: C2.1 C3.1 C4.1 C5.1 C6.1 C7.1 C8.1 C9.1 C10.1 C11.1 C128.1 C129.1 R64.1 TP7.1 U1.A6 U1.A17 U1.AB6 U1.AB17 U1.F1 U1.F22 U1.U1 U1.U22 U10.2 U10.3 U10.6 U10.7 | length 3137.9
  Top Layer w5: v1(9664.83,7554.11) U1.U1@9684.52,7534.43 ; U1.F1@9684.52,7967.5 v1(9704.2,7987.19) ; v1(9861.68,7317.89) U1.AB6@9881.37,7337.58 ; v1(9861.68,8184.04) U1.A6@9881.37,8164.35 ; U1.AB17@10314.44,7337.58 v1(10334.12,7317.89) ; U1.A17@10314.44,8164.35 v1(10334.12,8184.04) ; U1.U22@10511.29,7534.43 v1(10530.97,7514.74) ; U1.F22@10511.29,7967.5 v1(10530.97,7987.19)
  Top Layer w7.87: v2(10893.18,6467.5) 10944.36,6467.5 11007.35,6530.49 R64.1@11060.5,6530.49
  Top Layer w15.75: C3.1@9404.99,7502.93 9412.86,7506.87 v1(9412.86,7565.92) ; C3.1@9436.48,7502.93 9440.42,7506.87 v1(9440.42,7565.92) ; C3.1@9467.98,7502.93 v1(9467.98,7565.92) ; v1(10441.65,7224.79) 10454.79,7224.79 C2.1@10487.67,7191.91 ; v1(10475,7100) 10475,7132 C2.1@10491.6,7148.6
  Mid-Layer 2 w7.87: v1(9404.99,8148.6) 9428.61,8172.22 9428.61,8365.14 9386.36,8407.38 9386.36,9385.88 9460.11,9459.63 9460.11,9593.48 TP7.1@9412.86,9640.73
  Bottom Layer w15.75: v1(9404.99,8101.36) 9428.61,8077.74 C128.1@9448.3,8077.74 ; C128.1@9428.61,8109.23 9404.99,8132.85 v1(9404.99,8148.6) 9452.23,8101.36 C128.1@9460.11,8101.36 ; C128.1@9432.55,8085.61 9404.99,8113.17 v1(9404.99,8124.98) 9436.48,8093.48 C128.1@9452.23,8093.48 ; v4(10582.15,8132.85) C129.1@10653.02,8132.85 ; v4(10582.15,8172.22) C129.1@10653.02,8172.22
  Bottom Layer w20: v2(10893.18,6467.5) 10914.24,6446.44 U10.6@10991.6,6446.44 ; U10.7@10991.6,6496.44 U10.6@10991.6,6446.44 ; U10.2@11196.33,6496.44 U10.3@11196.33,6446.44 U10.6@10991.6,6446.44
  other v2: 10460.11,6404.51 10538.85,6408.44 10617.59,6408.44 10696.33,6408.44 10775.07,6408.44 10853.81,6408.44 10735.7,6467.5 10814.44,6467.5